# Altium PCB pcb.PcbDoc
Units mm, origin at the board's own origin, x right, y up, seen from the top; angles counter-clockwise.
Board outline 75 x 66.17 mm, 2 copper layers (Top Layer, Bottom Layer); 32 components, 27 nets, 104 pads, 16 vias.
Unrouted connection lines stored in the file: 1.
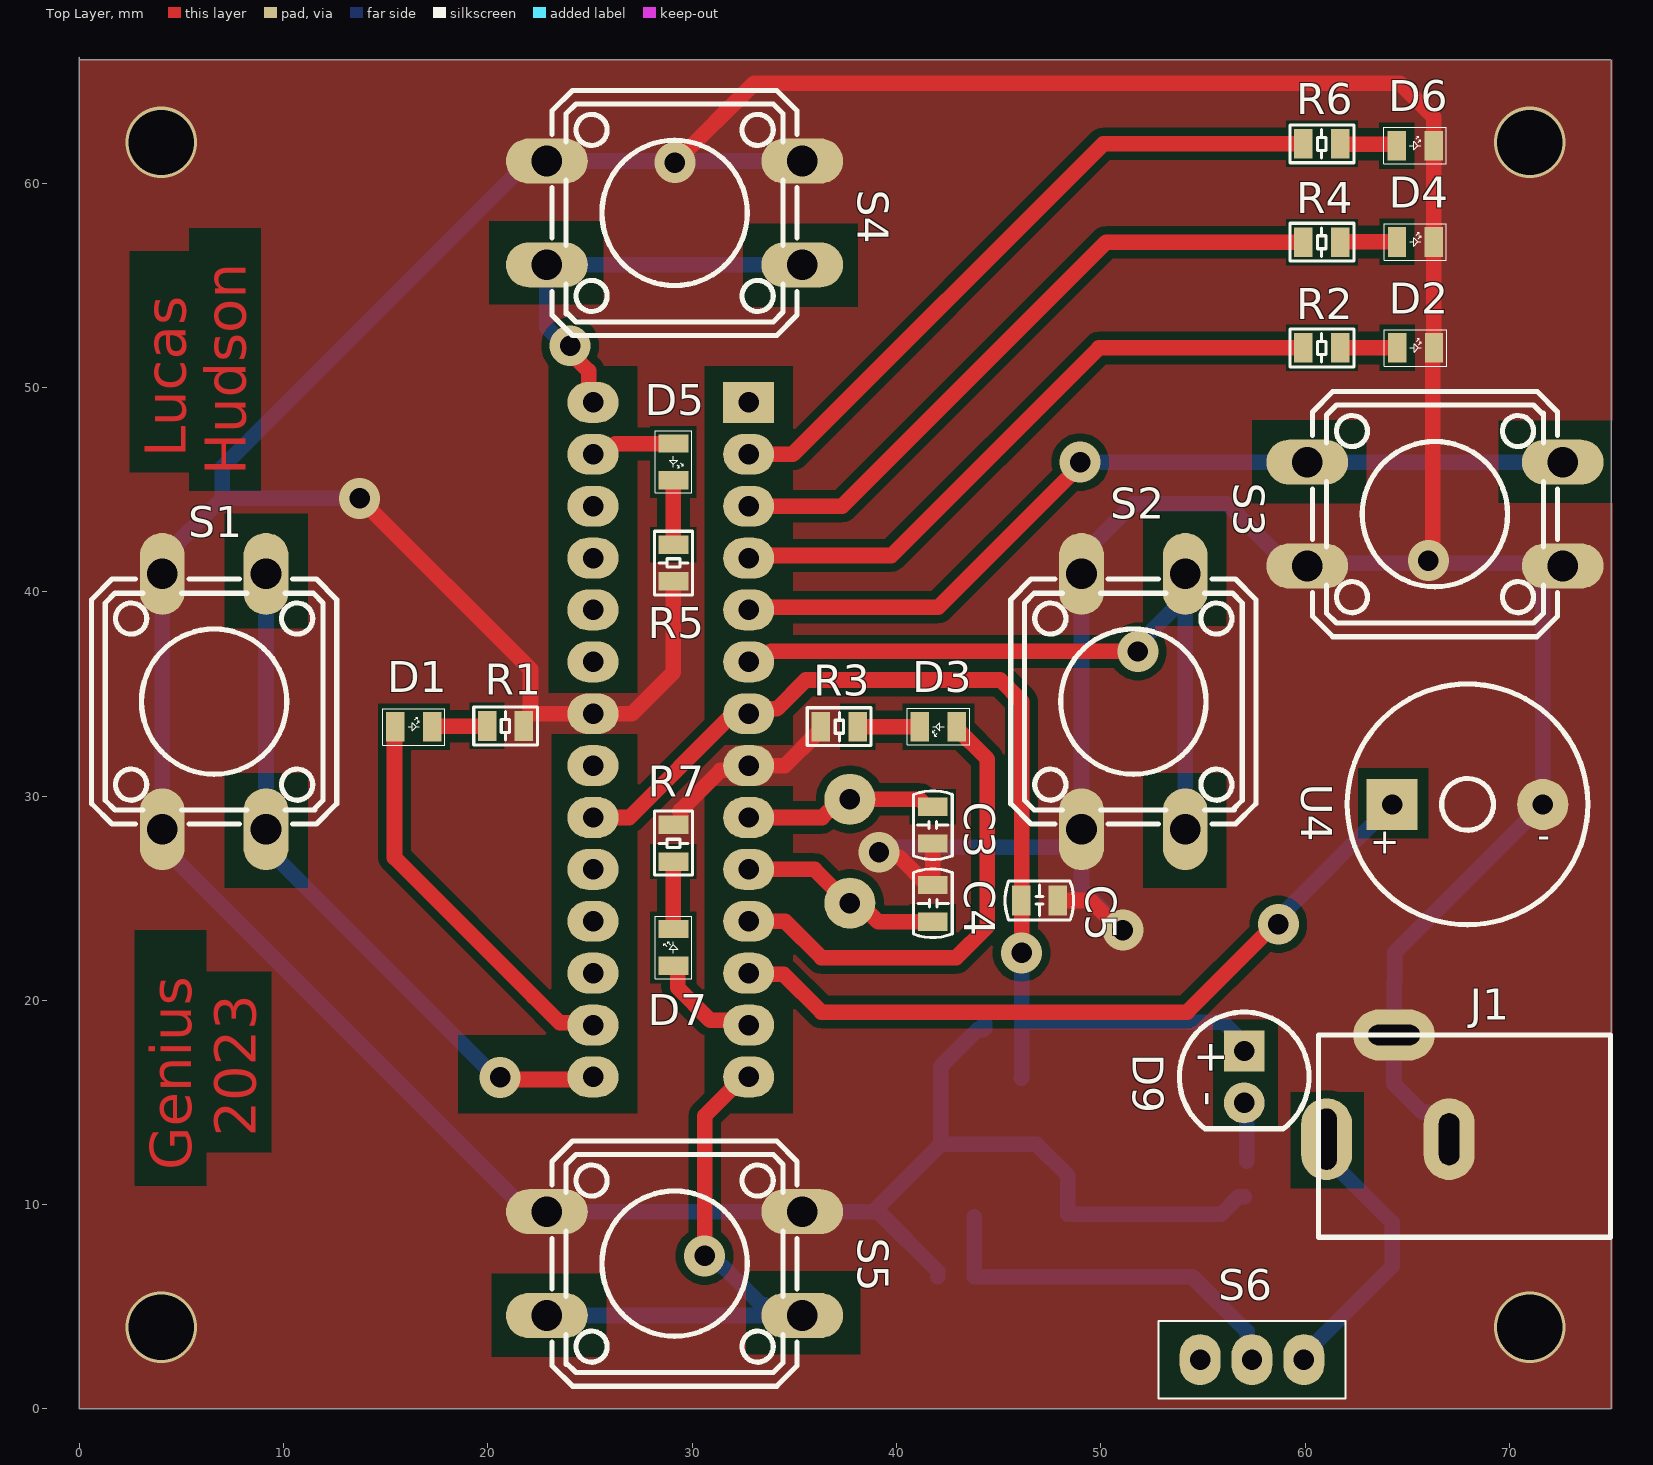
[diagram p0: Top Layer view]
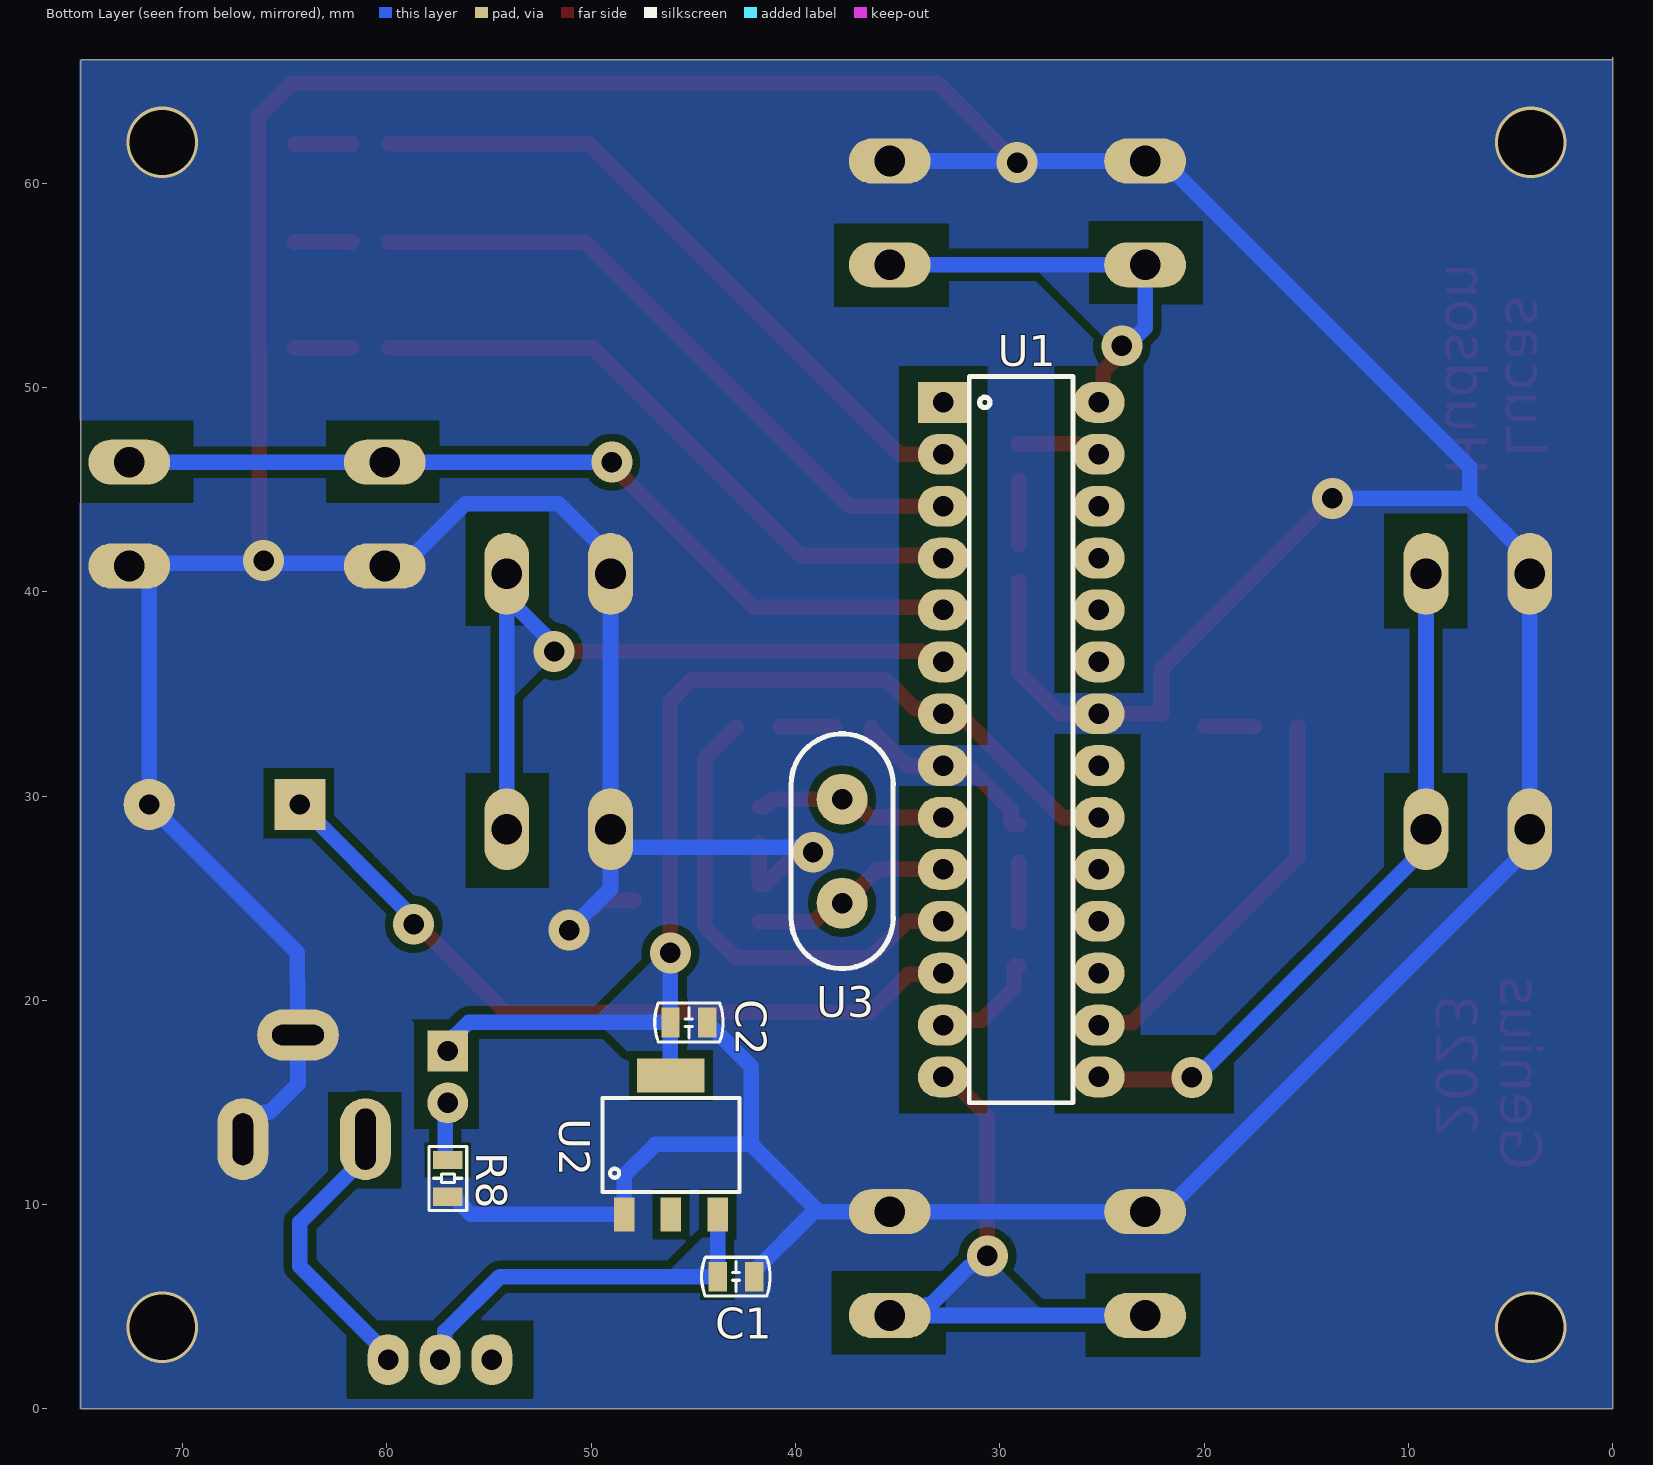
[diagram p1: Bottom Layer view, seen from below]
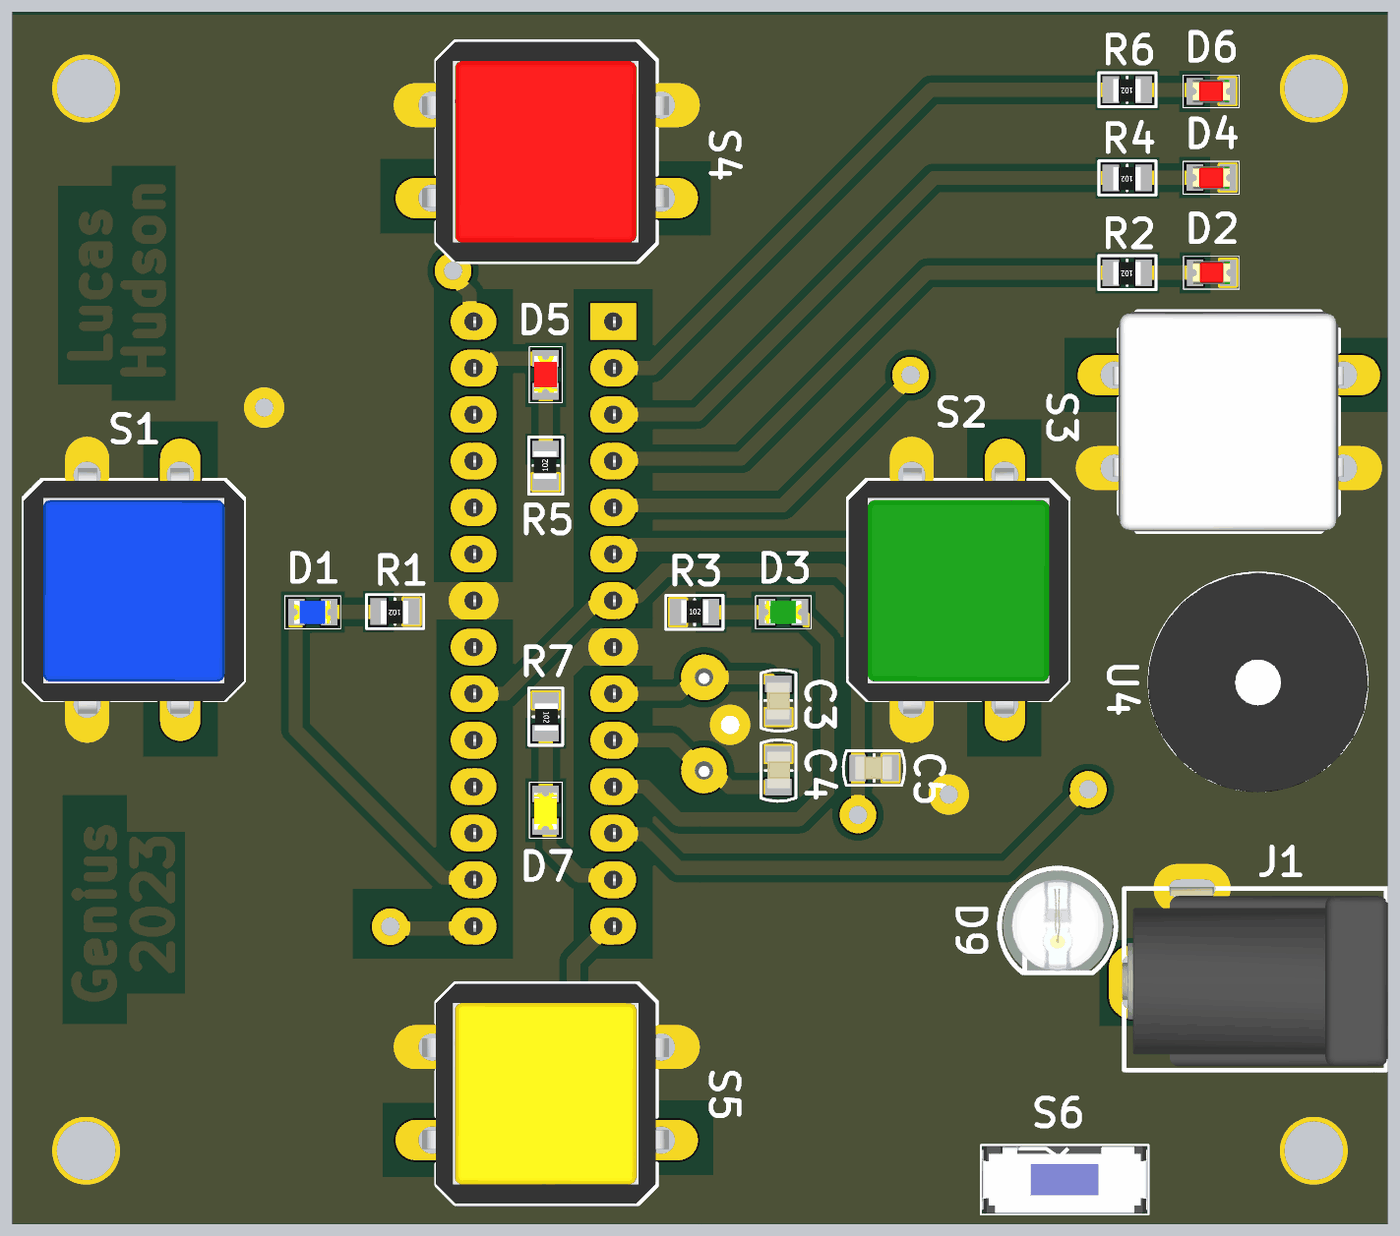
[diagram p2: 3D render of the assembled board from above, using the file's embedded part models]
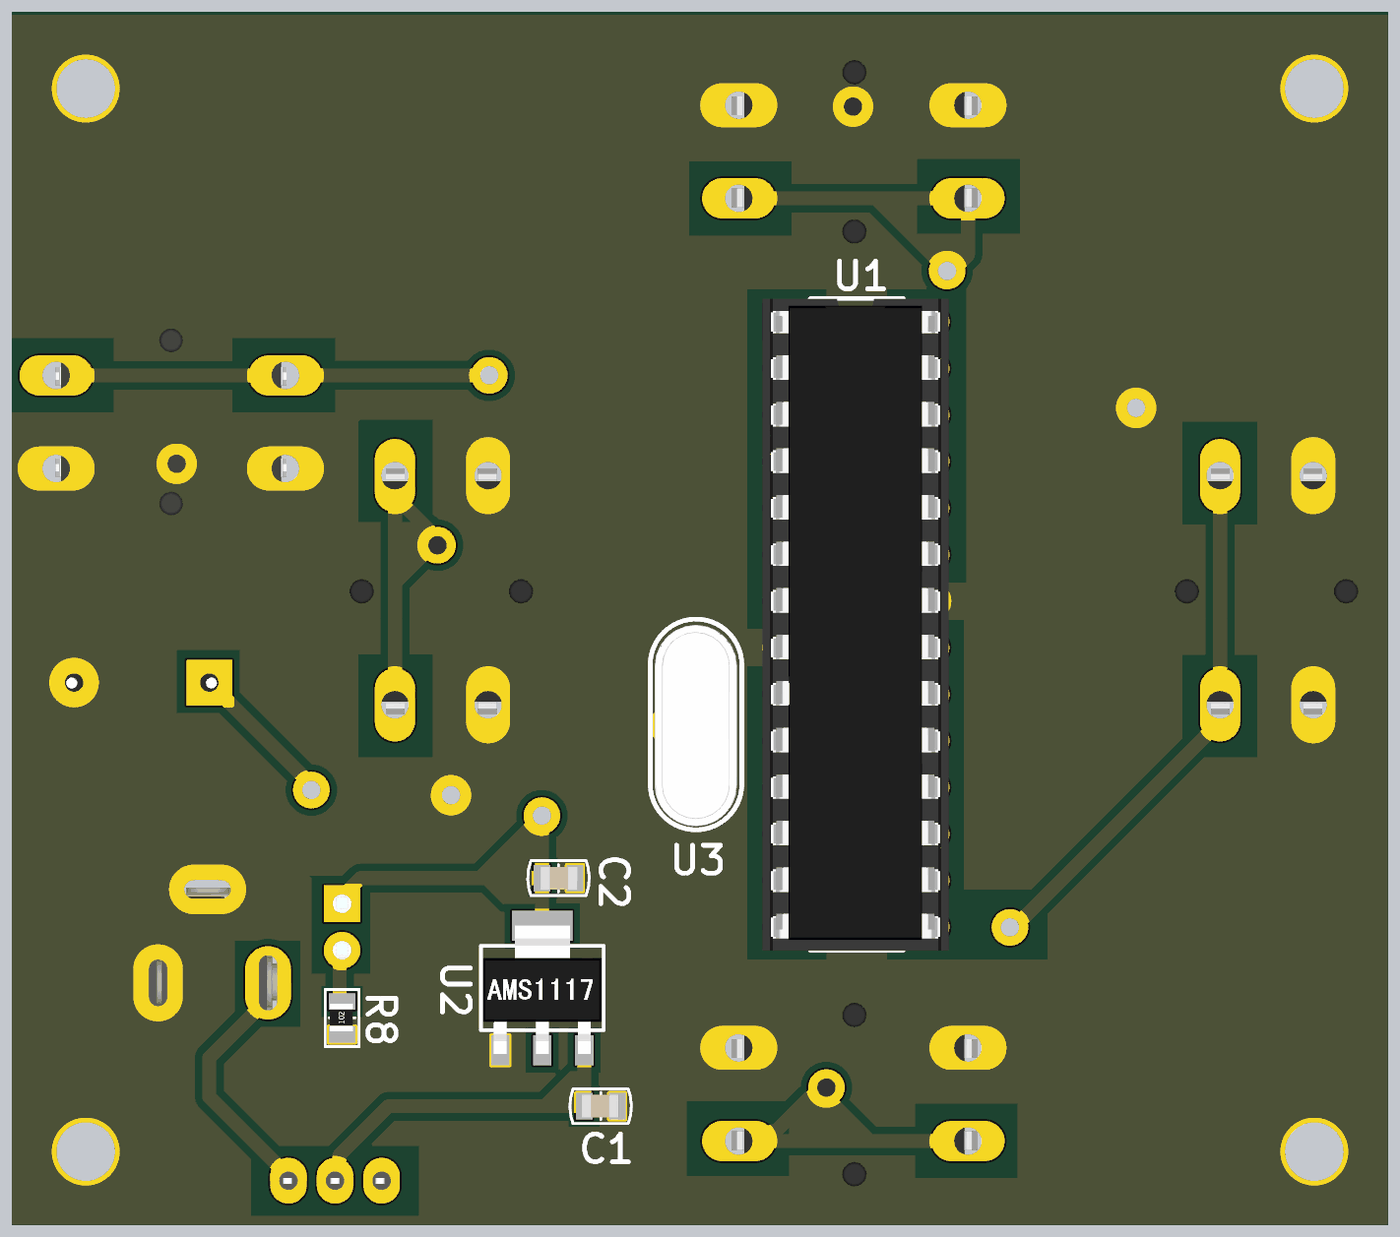
[diagram p3: 3D render of the assembled board from below, using the file's embedded part models]

## Layer stack, top to bottom
Top Solder: solder mask 0.0102, Solder Resist, Dk 3.5
Top Layer: signal copper 0.0356
Dielectric 1: dielectric 0.32, FR-4, Dk 4.8
Bottom Layer: signal copper 0.0356
Bottom Solder: solder mask 0.0102, Solder Resist, Dk 3.5

## Board outline
0,0 0,66.167 0,66.04 74.96,66.04 75,66 75,0

## Design rules (kind name [scope] priority, off if disabled: settings)
Clearance [All] p1: gap=0.254 ignorepadtopadclearanceinfootprint=FALSE except(0: Arc-Hole Track-Hole SMDPad-Hole THPad-Hole Via-Hole Fill-Hole Poly-Hole Region-Hole Text-Hole; 0.4: Arc-Fill Arc-Poly Arc-Region Track-Fill Track-Poly Track-Region SMDPad-Fill SMDPad-Poly SMDPad-Region THPad-Fill THPad-Poly THPad-Region Via-Fill Via-Poly Via-Region Fill-Fill Fill-Poly Fill-Region Poly-Poly Poly-Region Region-Region)
HoleSize [All] p1: absolutevalues=TRUE maxlimit=3.2 minlimit=0.025 maxpercent=80.000 minpercent=20.000
PolygonConnect [All] p1: connectstyle=Direct reliefconductorwidth=0.254 reliefentries=4 polygonreliefangle="90 Angle" airgapwidth=0.254
RoutingVias [All] p1: holewidth=0.711 width=1.27 viastyle="Through Hole" minholewidth=0.711 minwidth=1.27 maxholewidth=3.2 maxwidth=3.505
SilkToSolderMaskClearance [IsPad] p1: minsilkscreentomaskgap=0 clearancetoexposedcopper=TRUE
SolderMaskExpansion [All] p1: expansion=0.102 istentingtop=FALSE
Width [All] p1: maxlimit=0.762 minlimit=0.762 preferedwidth=0.762 minimp=50.000000 maximp=50.000000 favimp=50.000000
28 further rules are at their usual default settings.

## Components (designator, comment, footprint, x,y, rotation, side; value= is the part's Value field where it differs from the comment)
C1 "0805 10uF" "CAPACITOR 0805" 42.914,4.953 r180 bottom
C2 "0805 10uF" "CAPACITOR 0805" 45.224,20.447 r0 bottom
C3 "0805 22pF" "CAPACITOR 0805" 43.307,28.587 r90 top
C4 "0805 22pF" "CAPACITOR 0805" 40.259,24.753 r270 top
C5 "0805 100nF" "CAPACITOR 0805" 47.002,23.368 r0 top
D1 "LED_0805_BLUE" LED_0805_BLUE 14.776,34.3 r270 top
D2 "LED_0805_WHITE" LED_0805_WHITE 63.82,52.842 r270 top
D3 "LED_0805_GREEN" LED_0805_GREEN 43.644,32.502 r90 top
D4 "LED_0805_WHITE" LED_0805_WHITE 63.805,58.031 r270 top
D5 "LED_0805_RED" LED_0805_RED 29.982,47.962 r180 top
D6 "LED_0805_WHITE" LED_0805_WHITE 63.798,62.748 r270 top
D7 "LED_0805_YELLOW" LED_0805_YELLOW 28.184,20.999 r0 top
D9 "LED_5mm_WHITE" LED_5mm_WHITE 54.122,19.226 r270 top
J1 "JACK_P4" JACK_P4 60.627,8.382 r0 top
R1 "RESISTOR_0805_1k" RESISTOR_0805_1k 20.828,31.877 r0 top
R2 "RESISTOR_0805_1k" RESISTOR_0805_1k 60.791,50.383 r0 top
R3 "RESISTOR_0805_1k" RESISTOR_0805_1k 37.231,34.961 r180 top
R4 "RESISTOR_0805_1k" RESISTOR_0805_1k 60.791,55.557 r0 top
R5 "RESISTOR_0805_1k" RESISTOR_0805_1k 27.523,41.444 r270 top
R6 "RESISTOR_0805_1k" RESISTOR_0805_1k 60.791,60.373 r0 top
R7 "RESISTOR_0805_1k" RESISTOR_0805_1k 30.643,27.665 r90 top
R8 "RESISTOR_0805_1k" RESISTOR_0805_1k 58.583,11.323 r270 bottom
S1 "PUSH_BUTTON_12X12_BLUE" PUSH_BUTTON_12X12_BLUE 6.349,35.841 r90 top
S2 "PUSH_BUTTON_12X12_GREEN" PUSH_BUTTON_12X12_GREEN 51.349,35.841 r90 top
S3 "PUSH_BUTTON_12X12" PUSH_BUTTON_12X12_WHITE 65.151,43.561 r180 top
S4 "PUSH_BUTTON_12X12_RED" PUSH_BUTTON_12X12_RED 30.349,58.801 r0 top
S5 "PUSH_BUTTON_12X12_YELLOW" PUSH_BUTTON_12X12_YELLOW 30.349,7.366 r0 top
S6 "SS12D00G4" SS12D00G4 52.835,0.554 r0 top
U1 "ATMEGA328-PU" ATMEGA328-PU 31.559,14.973 r180 bottom
U2 "AMS1117" AMS1117 42.291,8.226 r90 bottom
U3 "CRISTAL_16Mhz" CRISTAL_16Mhz 35.496,21.763 r90 bottom
U4 "BUZZER_12mm" BUZZER_12mm 74.051,35.568 r180 top

## Footprints (in the part's own frame and the unit in brackets; to place one, negate y for a bottom-side part, rotate by r counter-clockwise, add the part's x,y. Pads: shape width x height; smd on the part's side, far side on the other; paste and mask are expansions set on the pad)
AMS1117 [mm] "IC REG LINEAR 1A SOT-89-3L"
  rect 1.65x1 smd: 1(1.299,6.1) 2(1.299,3.81) 3(1.299,1.52)
  rect 1.65x3.3 smd: 2(8.099,3.81)
  silkscreen extent 2.4,0.46 7,7.16, body extent 1.1,0.56 8.1,7.06, height 1.87
ATMEGA328-PU [mm] "Microcontroller 8-bit 20MHz  Flash 32KB DIP-28"
  rect 2.5x2 hole 1: 1(-1.206,34.303)
  oval 2.5x2 hole 1: 2(-1.206,31.763) 3(-1.206,29.223) 4(-1.206,26.683) 5(-1.206,24.143) 6(-1.206,21.603) 7(-1.206,19.063) 8(-1.206,16.523) 9(-1.206,13.983) 10(-1.206,11.443) 11(-1.206,8.903) 12(-1.206,6.363) 13(-1.206,3.823) 14(-1.206,1.283) 15(6.413,1.283) 16(6.414,3.823) 17(6.414,6.363) 18(6.414,8.903) 19(6.414,11.443) 20(6.414,13.983) 21(6.414,16.523) 22(6.414,19.063) 23(6.414,21.603) 24(6.414,24.143) 25(6.414,26.683) 26(6.414,29.223) 27(6.414,31.763) 28(6.414,34.303)
  silkscreen extent 0.06,0.01 5.14,35.57, body extent -2.54,0 7.62,35.56, height 7.87
BUZZER_12mm [mm] "BUZZER MAGNETIC 12MM"
  rect 2.5x2.5 hole 1: 1(9.789,5.977)
  round 2.5 hole 1: 2(2.413,5.977)
  silkscreen extent 0.2,0.08 11.99,11.86, body extent 0.1,0 12.09,12, height 9.51
"CAPACITOR 0805" [mm]
  rect 0.9x1.45 smd: 1(-0.901,1.524) 2(0.899,1.524)
  silkscreen extent -1.68,0.57 1.67,2.47, body extent -1.03,0.9 0.97,2.15, height 0.61
CRISTAL_16Mhz [mm] "CRYSTAL 16MHZ PTH"
  round 2.5 hole 1: 1(3.002,2.222) 2(8.082,2.222)
  silkscreen extent -0.2,-0.34 11.29,4.78, body extent -0.02,-0.02 10.98,4.48, height 3.55
JACK_P4 [mm]
  oval 2.5x4 hole 1 slot 3 at 90 deg: 1(0.429,4.826)
  oval 2.5x4 hole 1 slot 2.54 at 90 deg: 2(6.429,4.826)
  oval 4x2.5 hole 1 slot 2.54 at 0 deg: 3(3.729,9.926)
  silkscreen extent 0.03,0.03 14.33,9.93, body extent -0.09,0.23 14.41,10.03, height 11.38
LED_5mm_WHITE [mm]
  rect 2x2 hole 1: 1(1.7,2.901)
  round 2 hole 1: 2(4.24,2.901)
  silkscreen extent -0.2,-0.27 5.51,6.07, body extent -0.08,-0.1 5.42,5.9, height 8.6
LED_0805_BLUE [mm]
  rect 1.45x0.9 smd: 1(0.899,0.696) 2(0.899,2.496)
  silkscreen extent 0.01,0.07 1.8,3.12, body extent 0.28,0.57 1.53,2.57, height 1.1
LED_0805_GREEN [mm]
  rect 1.45x0.9 smd: 1(0.899,0.696) 2(0.899,2.496)
  silkscreen extent 0.01,0.07 1.8,3.12, body extent 0.28,0.6 1.53,2.6, height 1.1
LED_0805_RED [mm]
  rect 1.45x0.9 smd: 1(0.899,0.696) 2(0.899,2.496)
  silkscreen extent 0.01,0.07 1.8,3.12, body extent 0.28,0.57 1.53,2.57, height 1.1
LED_0805_WHITE [mm]
  rect 1.45x0.9 smd: 1(0.899,0.696) 2(0.899,2.496)
  silkscreen extent 0.01,0.07 1.8,3.12, body extent 0.28,0.59 1.53,2.61, height 1.1
LED_0805_YELLOW [mm]
  rect 1.45x0.9 smd: 1(0.899,0.696) 2(0.899,2.496)
  silkscreen extent 0.01,0.07 1.8,3.12, body extent 0.26,0.54 1.51,2.54, height 1.1
PUSH_BUTTON_12X12_BLUE [mm]
  oval 4x2.2 hole 1.5: 1(-7.462,2.292) 1(5.04,2.292) 2(-7.462,-2.788) 2(5.04,-2.788)
  silkscreen extent -7.21,-6.25 4.78,5.75, body extent -7.98,-6.26 5.44,5.75, height 8.84
PUSH_BUTTON_12X12_GREEN [mm]
  oval 4x2.2 hole 1.5: 1(-7.462,2.292) 1(5.04,2.292) 2(-7.462,-2.788) 2(5.04,-2.788)
  silkscreen extent -7.21,-6.25 4.78,5.75, body extent -7.98,-6.26 5.44,5.75, height 8.84
PUSH_BUTTON_12X12_RED [mm]
  oval 4x2.2 hole 1.5: 1(-7.462,2.292) 1(5.04,2.292) 2(-7.462,-2.788) 2(5.04,-2.788)
  silkscreen extent -7.21,-6.25 4.78,5.75, body extent -7.98,-6.26 5.44,5.75, height 8.84
PUSH_BUTTON_12X12_WHITE [mm]
  oval 4x2.2 hole 1.5: 1(-7.462,2.292) 1(5.04,2.292) 2(-7.462,-2.788) 2(5.04,-2.788)
  silkscreen extent -7.21,-6.25 4.78,5.75, body extent -7.49,-6.25 5.11,5.75, height 10.82
PUSH_BUTTON_12X12_YELLOW [mm]
  oval 4x2.2 hole 1.5: 1(-7.462,2.292) 1(5.04,2.292) 2(-7.462,-2.788) 2(5.04,-2.788)
  silkscreen extent -7.21,-6.25 4.78,5.75, body extent -7.98,-6.26 5.44,5.75, height 8.84
RESISTOR_0805_1k [mm]
  rect 0.9x1.45 smd: 1(-0.869,1.56) 2(0.931,1.56)
  silkscreen extent -1.52,0.64 1.6,2.49, body extent -0.74,0.9 0.76,2.15, height 0.7
SS12D00G4 [mm]
  oval 2x2.5 hole 1: 1(2.029,1.859) 2(4.569,1.859) 3(7.109,1.859)
  silkscreen extent 0,-0.04 9.14,3.76, body extent 0.07,0.06 9.07,3.66, height 5.5

## Part data
C1 C2 C3 C4 C5: library part "CAPACITOR 0805"
S1 S2 S4 S5: library part PUSH_BUTTON_12X12
U1: "Microcontroller 8-bit 20MHz  Flash 32KB DIP-28", ComponentLink1Description=Datasheet, ComponentLink1URL=https://www.mouser.com/datasheet/2/268/ATmega48A_PA_88A_PA_168A_PA_328_P_DS_DS40002061B-3050139.pdf, Digikey PN=ATMEGA328P-PU-ND, Mouser PN=556-ATMEGA328P-PU
U2: "IC REG LINEAR 1A SOT-89-3L", ComponentLink1Description=Datasheet, ComponentLink1URL=http://www.advanced-monolithic.com/pdf/ds1117.pdf, Digikey PN=4518-AMS1117-3.3CT-ND
U3: "CRYSTAL 16MHZ PTH", Digikey PN=3155-16M20P2/49US-ND, Mouser PN=449-LFXTAL022786BULK
U4: "BUZZER MAGNETIC 12MM", Digikey PN=433-WT-1209T-ND, Mouser PN=433-WT-1209T-ND

## Via types
v1: diameter 2, hole 1, Top Layer to Bottom Layer, 12 vias
v2: diameter 3.5, hole 3.2, Top Layer to Bottom Layer, 4 vias

## Nets (pads, with @x,y where several pads share a name; then routed paths per layer and width w, separated by ;. In a path a pad name is that pad's centre, name@x,y a point inside that pad or via, vN(x,y) a via of type N, cw(c..) or ccw(c..) an arc to the next point about the centre after c; other vN are vias at no path point)
BTN_BLUE: S1.2 U1.15 | length 34.3
  Top Layer w0.762: S1.2@9.137,27.479 S1.2@9.137,28.379 ; v1@20.487,16.129 U1.15@25.346,16.129
  Bottom Layer w0.762: S1.2@9.137,27.479 v1@20.487,16.129 ; S1.2@9.137,28.379 S1.2@9.137,40.881
  other v1: 20.596,16.234
BTN_CONTROL: S3.2 U1.5 | length 43
  Top Layer w0.762: U1.5@32.577,39.243 42.037,39.243 v1@49.149,46.355 ; S3.2@60.105,46.355 S3.2@60.111,46.349
  Bottom Layer w0.762: v1@49.149,46.355 S3.2@60.105,46.355 ; S3.2@60.111,46.349 S3.2@72.613,46.349
  other v1: 48.992,46.352
BTN_GREEN: S2.2 U1.6 | length 36
  Top Layer w0.762: U1.6 33.351,36.576 33.859,37.084 v1(51.816,37.084)
  Bottom Layer w0.762: U1.6 U1.6@32.946,36.756 ; v1(51.816,37.084) 51.816,37.419 54.229,39.832 S2.2@54.229,40.026 ; S2.2@54.137,28.379 54.137,39.832 S2.2@54.137,40.881
BTN_RED: S4.2 U1.28 | length 20.2
  Top Layer w0.762: v1(24.025,52.048) 24.025,51.713 24.926,50.812 24.926,49.496 U1.28
  Bottom Layer w0.762: v1@23.898,51.921 22.887,52.932 22.887,56.013 S4.2@35.389,56.013
BTN_YELLOW: S5.2 U1.14 | length 26.9
  Top Layer w0.762: v1(30.607,7.493) 30.607,14.347 32.516,16.256 U1.14
  Bottom Layer w0.762: S5.2@22.887,4.578 S5.2@33.903,4.578 ; v1(30.607,7.493) 30.942,7.493 31.505,6.93 31.551,6.93 33.372,5.109 33.569,5.109 33.903,4.774 S5.2@33.903,4.578 ; S5.2@35.389,4.578 34.489,4.578 S5.2@33.903,4.578
BUZZER: U1.12 U4.1 | length 36.6
  Top Layer w0.762: U1.12 32.819,21.283 34.47,21.283 36.322,19.431 54.227,19.431 v1@58.61,23.813
  Bottom Layer w0.762: v1(58.696,23.727) 58.696,24.025 U4.1
GND: C1.2 C2.1 C3.1 C4.1 C5.2 D2.2 D4.2 D6.2 J1.2 J1.3 R1.2 R3.2 R5.2 R7.2 R8.2 S1.1 S2.1 S3.1 S4.1 S5.1 U1.8 U1.22 U2.1 U4.2 | length 329
  Top Layer w0.762: v1(13.716,44.577) 22.083,36.21 22.083,34.036 27.051,34.036 29.083,36.068 R5.2 ; R7.2 29.358,28.597 29.427,28.666 29.427,29.3 31.386,31.259 32.529,31.259 U1.8 34.54,31.496 36.101,33.057 36.231,33.057 36.3,33.126 R3.2 ; v1(29.156,61.014) 33.039,64.897 64.643,64.897 66.294,63.246 D6.2 66.298,61.845 66.298,57.135 D4.2 66.309,57.124 66.309,51.95 D2.2 66.247,51.874 66.247,41.736 v1(66.04,41.529) ; 40.142,27.02 41.508,25.654 C4.1 C3.1 ; C5.2 49.496,24.892 50.941,23.447 v1(51.081,23.447)
  Bottom Layer w0.762: v1(13.716,44.577) 6.985,44.577 ; S4.1@35.389,61.093 22.887,61.093 21.987,61.093 6.985,46.091 6.985,44.577 ; v1(39.143,27.257) 39.38,27.493 S2.1@48.393,27.493 ; C1.2 42.015,6.752 39.109,9.658 38.868,9.658 ; C2.1 44.323,18.648 44.254,18.579 43.979,18.579 42.164,16.764 42.164,12.954 ; v1(51.081,23.447) 49.057,25.471 49.057,28.379 49.057,40.881 49.057,41.781 51.599,44.323 56.157,44.323 59.211,41.269 60.111,41.269 60.241,41.399 65.91,41.399 v1(66.04,41.529) 66.17,41.399 72.483,41.399 S3.1@72.613,41.269 ; R8.2 56.748,10.392 55.881,9.525 U2.1 48.391,11.426 46.863,12.954 42.164,12.954 ; J1.2@67.056,13.215 67.056,13.488 66.027,14.517 65.754,14.517 64.903,15.368 64.356,15.915 J1.3 64.373,18.324 64.373,20.939 64.389,20.955 64.389,22.342 U4.2 S3.1@71.638,40.605 ; 6.985,44.577 4.057,41.649 4.057,40.881 4.057,28.379 4.057,27.533 21.933,9.658 22.887,9.658 35.389,9.658 38.868,9.658 ; 38.868,9.658 42.164,12.954
  other v2: 4,4 71,4 4,62 71,62
LED_1: R2.1 U1.4 | length 31.4
  Top Layer w0.762: U1.4@32.706,41.783 39.751,41.783 49.911,51.943 R2.1
LED_2: R4.1 U1.3 | length 32.6
  Top Layer w0.762: U1.3@32.669,44.196 37.338,44.196 50.259,57.117 R4.1
LED_3: R6.1 U1.2 | length 33.6
  Top Layer w0.762: U1.2@32.621,46.736 34.925,46.736 50.122,61.933 R6.1
LED_BLUE: D1.1 U1.16 | length 19.5
  Top Layer w0.762: D1.1@15.426,33.401 15.426,26.992 22.231,20.188 23.506,18.912 25.03,18.912 U1.16
LED_GREEN: D3.1 U1.11 | length 23.5
  Top Layer w0.762: U1.11 34.544,23.876 36.322,22.098 42.926,22.098 44.45,23.622 44.45,31.818 D3.1@42.867,33.401
LED_RED: D5.1 U1.27 | length 4.1
  Top Layer w0.762: U1.27 25.731,46.736 26.239,47.244 D5.1@29.083,47.244
LED_YELLOW: D7.1 U1.13 | length 5.5
  Top Layer w0.762: D7.1 29.214,21.695 29.283,21.626 29.283,20.628 30.878,19.033 32.529,19.033 U1.13
NetD1_2: D1.2 R1.1 | length 2.4
  Top Layer w0.762: D1.2@17.526,33.401 17.544,33.419 R1.1@19.941,33.419
NetD2_1: D2.1 R2.2 | length 2.8
  Top Layer w0.762: R2.2 D2.1
NetD3_2: D3.2 R3.1 | length 2.7
  Top Layer w0.762: R3.1 D3.2@40.767,33.401
NetD4_1: D4.1 R4.2 | length 2.8
  Top Layer w0.762: R4.2 61.737,57.132 D4.1 D4.1@64.516,57.146
NetD5_2: D5.2 R5.1 | length 3.2
  Top Layer w0.762: R5.1 D5.2
NetD6_1: D6.1 R6.2 | length 2.8
  Top Layer w0.762: R6.2 61.736,61.919 64.498,61.919 D6.1@64.511,61.906
NetD7_2: D7.2 R7.1 | length 3
  Top Layer w0.762: D7.2@29.083,23.817 R7.1
NetD9_2: D9.2 R8.1 | length 3.1
  Top Layer w0.762: D9.2@57.15,15.118 D9.2@57.15,15.24
  Bottom Layer w0.762: R8.1@57.15,12.123 D9.2@57.15,15.118
NetJ1_1: J1.1 S6.3 | length 13.9
  Bottom Layer w0.762: S6.3 59.944,2.663 64.262,6.981 64.262,9.13 61.056,12.336 J1.1
PB6: C3.2 U1.9 U3.2 | length 10.2
  Top Layer w0.762: U1.9 36.36,28.956 37.249,29.845 U3.2 41.149,29.845 41.508,29.486 C3.2
  Bottom Layer w0.762: U3.2@37.386,29.512 U3.2@37.419,29.545 ; U3.2@37.558,29.515 37.528,29.545 U3.2@37.419,29.545 ; U3.2 U3.2@37.419,29.545
PB7: C4.2 U1.10 U3.1 | length 10.2
  Top Layer w0.762: U1.10 35.986,26.416 37.637,24.765 U3.1 38.189,24.765 39.101,23.854 C4.2
  Bottom Layer w0.762: U3.1@37.637,24.765 U3.1
V5: C2.2 C5.1 D9.1 U1.7 U1.20 U2.2 | length 54.2
  Top Layer w0.762: U1.20 26.924,28.956 31.767,33.799 32.529,33.799 33.003,34.273 34.146,34.273 35.56,35.687 45.085,35.687 46.123,34.649 v1(46.123,22.33)
  Bottom Layer w0.762: U2.2@46.105,16.198 46.123,16.216 C2.2 ; v1(46.123,22.33) C2.2 ; D9.1@57.15,17.78 56.007,18.923 C2.2
VCC: C1.1 S6.2 U2.3 | length 19
  Bottom Layer w0.762: U2.3@43.815,9.398 C1.1 54.483,6.477 57.167,3.793 57.167,2.523 S6.2@57.404,2.286
pads on no net: S6.1 U1.1 U1.17 U1.18 U1.19 U1.21 U1.23 U1.24 U1.25 U1.26

## Polygon pours and split planes (outlines as drawn)
GND on Bottom Layer "NONET_L-01_P-001" (solid, remove dead copper, pour order 23): 0,0 75.057,0 75.057,66.04 0,66.04
BTN_YELLOW on Bottom Layer "NONET_L-01_P-001" (solid, remove dead copper, pour order 19): 30.607,7.493 27.813,4.699 33.782,4.699 33.903,4.578
BTN_GREEN on Bottom Layer "BTN_GREEN_L02_P000" (solid, remove dead copper, pour order 0): 51.244,37.401 54.102,34.544 54.102,40.259
BTN_RED on Bottom Layer "BTN_RED_L02_P007" (solid, remove dead copper, pour order 7): 22.86,55.626 22.86,52.959 24.13,51.689 28.448,56.007 22.893,56.007 22.887,56.013
VCC on Bottom Layer "VCC_L02_P003" (solid, remove dead copper, pour order 3): 43.815,6.477 46.482,6.477 43.815,9.144
V5 on Bottom Layer "V5_L02_P002" (solid, remove dead copper, pour order 2): 46.123,22.838 49.847,19.113 46.799,16.065 46.123,16.742
V5 on Bottom Layer "V5_L02_P001" (solid, remove dead copper, pour order 1): 46.105,16.198 48.768,18.861 48.768,18.923 46.101,21.59
GND on Top Layer "NONET_L-01_P-001" (solid, remove dead copper, pour order 22): 0,0 75.057,0 75.057,66.04 0,66.04

## Other copper
Top Layer:
  pour cut-out: 62.611,31.369 62.611,27.94 66.04,27.94 66.04,31.369
  pour cut-out: 59.309,15.494 59.309,10.795 62.865,10.795 62.865,15.494
  pour cut-out: 19.304,34.417 19.304,32.512 20.701,32.512 20.701,34.417
  pour cut-out: 14.859,34.29 14.859,32.512 17.907,32.512 17.907,34.29
  pour cut-out: 65.151,52.832 65.151,51.054 63.881,51.054 63.881,52.832
  pour cut-out: 65.151,58.039 65.151,56.261 63.881,56.261 63.881,58.039
  pour cut-out: 65.151,62.738 65.151,60.96 63.881,60.96 63.881,62.738
  pour cut-out: 59.309,62.865 59.309,61.087 62.357,61.087 62.357,62.865
  pour cut-out: 59.309,58.039 59.309,56.261 62.357,56.261 62.357,58.039
  pour cut-out: 59.309,52.832 59.309,51.054 62.357,51.054 62.357,52.832
  pour cut-out: 38.798,32.385 38.798,34.417 37.401,34.417 37.401,32.385
  pour cut-out: 40.513,34.29 40.513,32.512 43.561,32.512 43.561,34.29
  pour cut-out: 40.767,28.829 42.799,28.829 42.799,30.226 40.767,30.226
  pour cut-out: 40.767,23.114 42.799,23.114 42.799,24.511 40.767,24.511
  pour cut-out: 38.228,6.744 32.64,6.744 32.64,2.68 38.228,2.68
  pour cut-out: 25.782,6.617 20.194,6.617 20.194,2.553 25.782,2.553
  pour cut-out: 75.058,48.4 69.47,48.4 69.47,44.336 75.058,44.336
  pour cut-out: 62.993,48.4 57.405,48.4 57.405,44.336 62.993,44.336
  pour cut-out: 11.189,25.526 11.189,31.114 7.125,31.114 7.125,25.526
  pour cut-out: 11.189,38.226 11.189,43.814 7.125,43.814 7.125,38.226
  pour cut-out: 20.065,54.089 25.653,54.089 25.653,58.153 20.065,58.153
  pour cut-out: 32.511,53.962 38.099,53.962 38.099,58.026 32.511,58.026
  pour cut-out: 52.07,43.942 52.07,38.354 56.134,38.354 56.134,43.942
  pour cut-out: 52.07,31.115 52.07,25.527 56.134,25.527 56.134,31.115
  pour cut-out: 55.499,19.05 55.499,13.716 58.674,13.716 58.674,18.923 58.801,19.05
  pour cut-out: 52.832,4.318 52.832,0.508 61.976,0.508 61.976,4.318
  pour cut-out: 30.607,32.512 34.925,32.512 34.925,51.054 30.607,51.054
  pour cut-out: 22.987,35.052 27.305,35.052 27.305,51.054 22.987,51.054
  pour cut-out: 30.607,14.478 34.925,14.478 34.925,30.48 30.607,30.48
  pour cut-out: 23.114,33.02 27.305,33.02 27.305,14.478 18.542,14.478 18.542,18.288 23.114,18.288
  text "Lucas" at 5.215,46.601 h2 r90
  text "Hudson" at 8.136,45.712 h2 r90
  text "2023" at 8.644,13.327 h2 r90
  text "Genius" at 5.469,11.676 h2 r90
Bottom Layer:
  pour cut-out: 62.611,31.369 62.611,27.94 66.04,27.94 66.04,31.369
  pour cut-out: 59.309,15.494 59.309,10.795 62.865,10.795 62.865,15.494
  pour cut-out: 45.466,19.939 45.466,17.907 46.863,17.907 46.863,19.939
  pour cut-out: 44.196,17.526 44.196,15.113 48.133,15.113 48.133,17.526
  pour cut-out: 45.212,10.61 45.212,8.324 46.961,8.324 46.961,10.61
  pour cut-out: 42.926,10.668 42.926,8.382 44.704,8.382 44.704,10.668
  pour cut-out: 38.228,6.744 32.64,6.744 32.64,2.68 38.228,2.68
  pour cut-out: 25.782,6.617 20.194,6.617 20.194,2.553 25.782,2.553
  pour cut-out: 75.058,48.4 69.47,48.4 69.47,44.336 75.058,44.336
  pour cut-out: 62.993,48.4 57.405,48.4 57.405,44.336 62.993,44.336
  pour cut-out: 11.189,25.526 11.189,31.114 7.125,31.114 7.125,25.526
  pour cut-out: 11.189,38.226 11.189,43.814 7.125,43.814 7.125,38.226
  pour cut-out: 20.065,54.089 25.653,54.089 25.653,58.153 20.065,58.153
  pour cut-out: 32.511,53.962 38.099,53.962 38.099,58.026 32.511,58.026
  pour cut-out: 52.07,43.942 52.07,38.354 56.134,38.354 56.134,43.942
  pour cut-out: 52.07,31.115 52.07,25.527 56.134,25.527 56.134,31.115
  pour cut-out: 55.499,19.05 55.499,13.716 58.674,13.716 58.674,18.923 58.801,19.05
  pour cut-out: 52.832,4.318 52.832,0.508 61.976,0.508 61.976,4.318
  pour cut-out: 30.607,32.512 34.925,32.512 34.925,51.054 30.607,51.054
  pour cut-out: 22.987,35.052 27.305,35.052 27.305,51.054 22.987,51.054
  pour cut-out: 30.607,14.478 34.925,14.478 34.925,30.48 30.607,30.48
  pour cut-out: 23.114,33.02 27.305,33.02 27.305,14.478 18.542,14.478 18.542,18.288 23.114,18.288

## Silkscreen, mask and mechanical layers (free items; w line width, h text height)
Top Overlay:
Mechanical 1:
  lines w0.254: 0,-0.127 75.057,-0.127 ; 0,0 0,66.04 75.057,66.04 ; 75.057,-0.116 75.057,65.924

## Text inside footprints (layer, text, board x,y; h text height)
D9: Top Overlay "+" at 54.757,18.083 h1.52 r270; Top Overlay "-" at 54.63,15.543 h1.52 r270
U4: Top Overlay "+" at 64.628,28.261 h1.27 r180; Top Overlay "-" at 71.994,28.431 h1.27 r180